# EAGLE board multicharger (EAGLE 9.4.0)
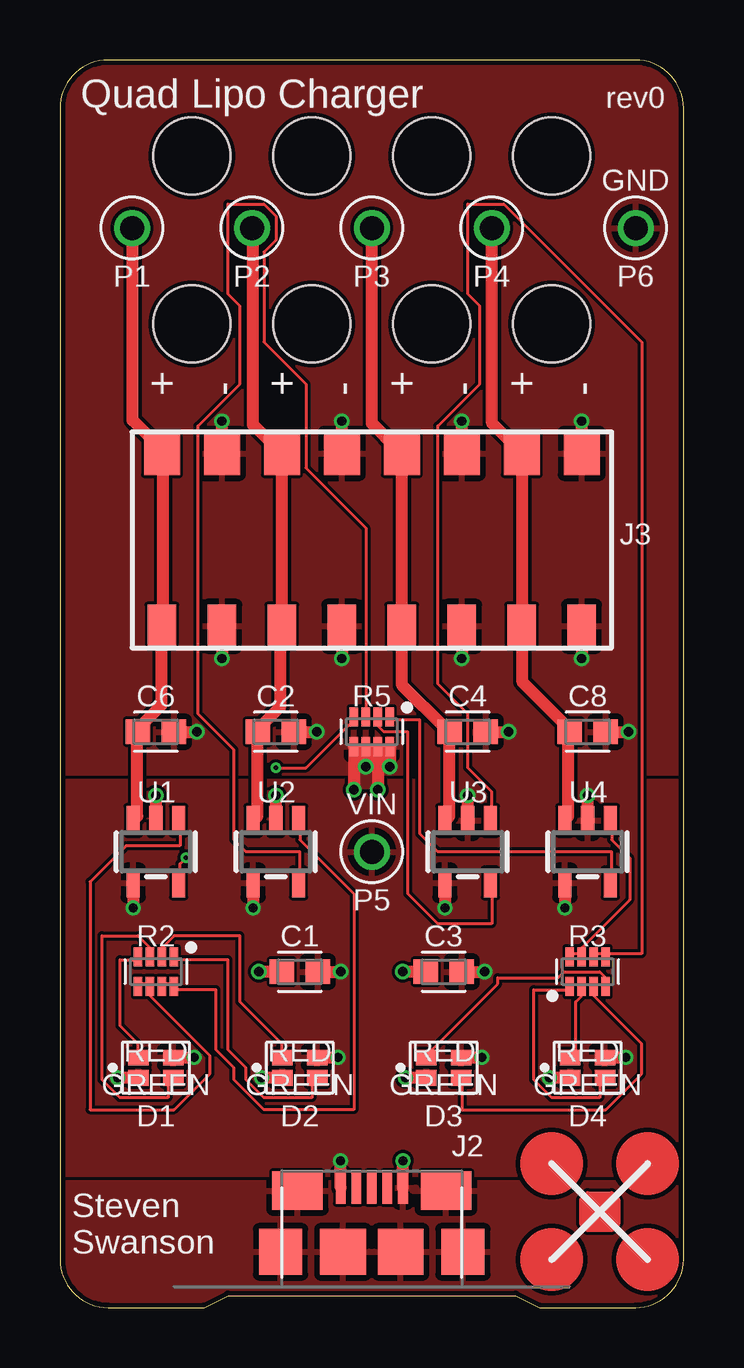
[diagram p0: board, top side]
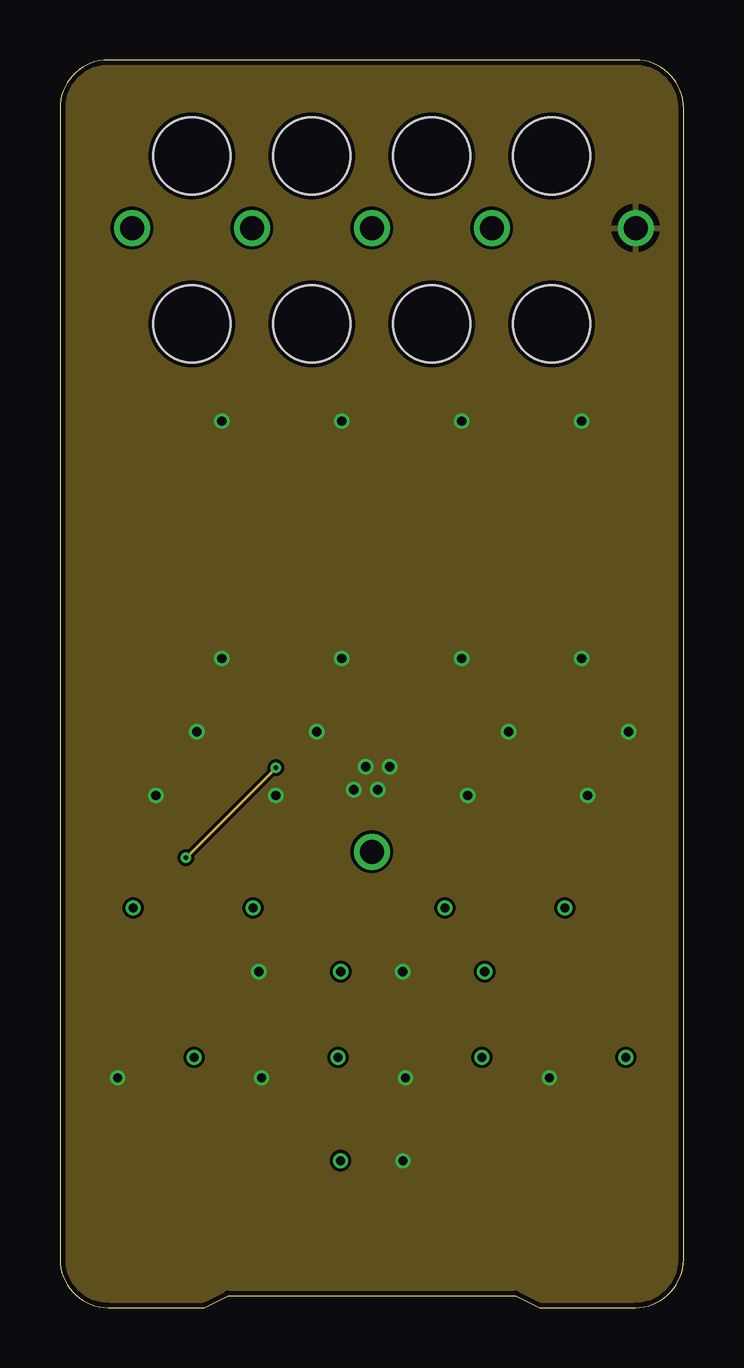
[diagram p1: board, inner layer Route2]
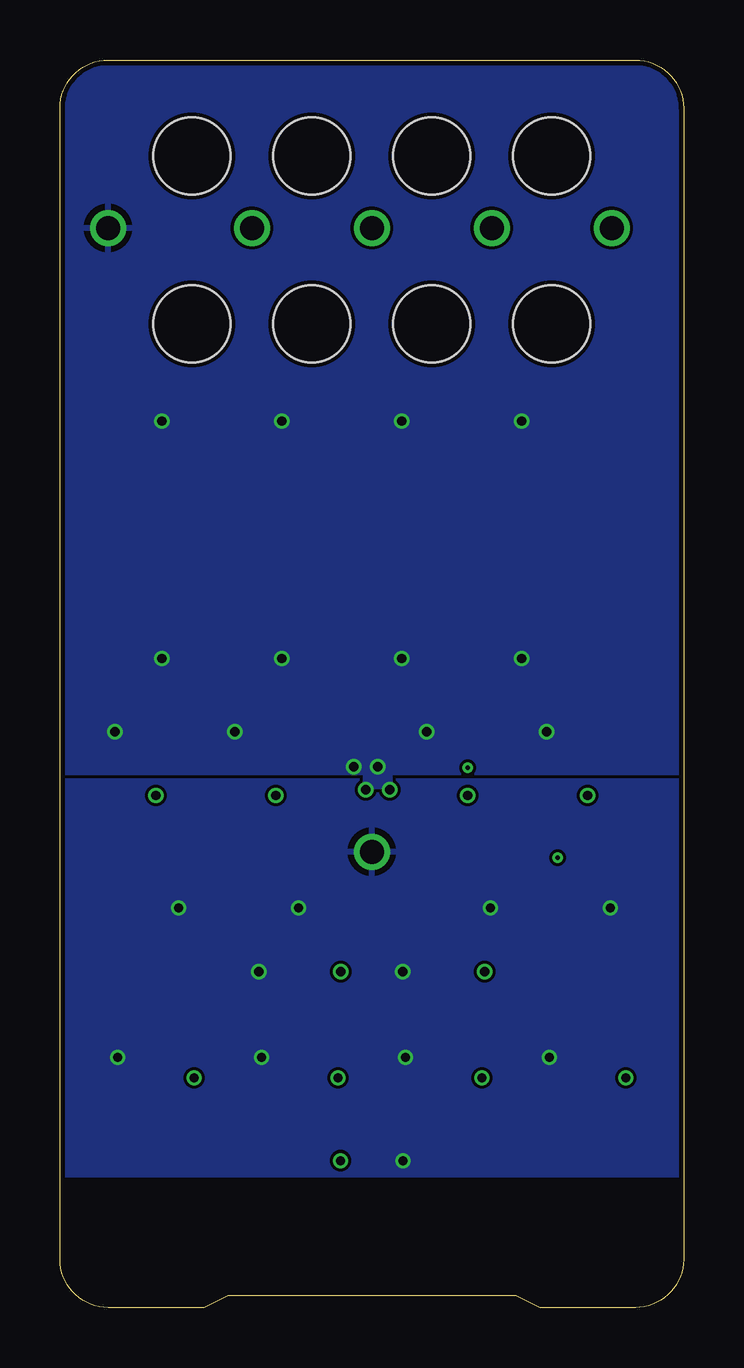
[diagram p2: board, bottom side, seen from below]

Size 26 x 52 mm. Coordinates in mm from the lower left corner, seen from the top.
Outline: 0,50 0,2 arc90 2,0 6,0 7,0.5 19,0.5 20,0 24,0 arc90 26,2 26,50 arc90 24,52 2,52 arc90 0,50
Copper layers (1*2*15*16): Top 0.035559375mm / dielectric 1.501140625mm / Route2 0.035559375mm / dielectric 0.149859375mm / Route15 0.035559375mm / dielectric 0.200659375mm / Bottom 0.035559375mm
Design rules "jlcpcb-4layer-5mil-small-cream": minimum track width 5mil, minimum drill 0.2mm, track to track 5mil, track to pad 5mil, pad to pad 5mil, via to via 5mil, smd to smd 5mil, copper to edge 0.2mm, drill to drill 10mil, minimum pad ring 3mil, minimum via ring 5mil, stop-mask expansion 0.05mm, vias tented up to drill 0.45mm, thermal gap 10mil
Net classes: 1 HIGH-I: drill 0.254 mm; 3 PWR: drill 0.381 mm; 4 LONG_PWR: width 0.508 mm, drill 0.381 mm
Holes 3.2 mm at 10.5,41 5.5,41 15.5,41 20.5,41 5.5,48 10.5,48 15.5,48 20.5,48

## Footprints (pad centres in the part's own frame; a part is rotated, then mirrored left to right if it is on the bottom)
CAPC1608X100 = smd 1.009 x 1.015: 1 -0.753,0; 2 0.753,0
LED-2X-LITE-ON-1.6MMX1.5MM = smd 0.85 x 0.65: A1 -0.725,0.425; A2 -0.725,-0.425; C1 0.725,0.425; C2 0.725,-0.425
USB-MICROA-10118192-0001LF = smd 0.4 x 1.35: 1 -1.3,0; 2 -0.65,0; 3 0,0; 4 0.65,0; 5 1.3,0 | smd 2.1 x 1.6: 6 3.1,-0.125; 7 -3.1,-0.125 | smd 1.8 x 1.9: 8 -3.8,-2.675; 11 3.8,-2.675 | smd 1.9 x 1.9: 9 1.2,-2.675; 10 -1.2,-2.675
WIRE-TERMINAL-1X8-2.5MM-SMD = smd 1.8 x 1.5: 1A 3.6,-8.75; 2A 3.6,-6.25; 3A 3.6,-3.75; 4A 3.6,-1.25; 5A 3.6,1.25; 6A 3.6,3.75; 7A 3.6,6.25; 8A 3.6,8.75 | smd 1.8 x 1.2: 1B -3.6,-8.75; 2B -3.6,-6.25; 3B -3.6,-3.75; 4B -3.6,-1.25; 5B -3.6,1.25; 6B -3.6,3.75; 7B -3.6,6.25; 8B -3.6,8.75
TEST-POINT-KEYSTONE-5000 = drill 1: T 0,0
RESCAXS50P200X100X45-8 = smd 0.79 x 0.339: 1 -0.62,0.75; 2 -0.62,0.25; 3 -0.62,-0.25; 4 -0.62,-0.75; 5 0.62,-0.75; 6 0.62,-0.25; 7 0.62,0.25; 8 0.62,0.75
SOT23-5 = smd 0.55 x 1.2: 1 -0.95,-1.3; 2 0,-1.3; 3 0.95,-1.3; 4 0.95,1.3; 5 -0.95,1.3

## Placement (x,y rotation side)
C1  10uF  [CAPC1608X100]  10,14 180 top
C2  10uF  [CAPC1608X100]  9,24 0 top
C3  10uF  [CAPC1608X100]  16,14 180 top
C4  10uF  [CAPC1608X100]  17,24 0 top
C6  10uF  [CAPC1608X100]  4,24 0 top
C8  10uF  [CAPC1608X100]  22,24 0 top
D1  LED-2X-GREEN/RED-1.6X1.5MM  [LED-2X-LITE-ON-1.6MMX1.5MM]  4,10 180 top
D2  LED-2X-GREEN/RED-1.6X1.5MM  [LED-2X-LITE-ON-1.6MMX1.5MM]  10,10 180 top
D3  LED-2X-GREEN/RED-1.6X1.5MM  [LED-2X-LITE-ON-1.6MMX1.5MM]  16,10 180 top
D4  LED-2X-GREEN/RED-1.6X1.5MM  [LED-2X-LITE-ON-1.6MMX1.5MM]  22,10 180 top
J2  USB-MICROA-AMPHENOL-10118192-0001LF  [USB-MICROA-10118192-0001LF]  13,5 0 top
J3  HEADER-8POS-  [WIRE-TERMINAL-1X8-2.5MM-SMD]  13,32 90 top
P1  TEST-POINT  [TEST-POINT-KEYSTONE-5000]  3,45 0 top
P2  TEST-POINT  [TEST-POINT-KEYSTONE-5000]  8,45 0 top
P3  TEST-POINT  [TEST-POINT-KEYSTONE-5000]  13,45 0 top
P4  TEST-POINT  [TEST-POINT-KEYSTONE-5000]  18,45 0 top
P5  TEST-POINT  [TEST-POINT-KEYSTONE-5000]  13,19 0 top
P6  TEST-POINT  [TEST-POINT-KEYSTONE-5000]  24,45 0 top
R2  510  [RESCAXS50P200X100X45-8]  4,14 270 top
R3  510  [RESCAXS50P200X100X45-8]  22,14 90 top
R5  2K  [RESCAXS50P200X100X45-8]  13,24 270 top
U1  MCP73831T-2ACI/OT  [SOT23-5]  4,19 180 top
U2  MCP73831T-2ACI/OT  [SOT23-5]  9,19 180 top
U3  MCP73831T-2ACI/OT  [SOT23-5]  17,19 180 top
U4  MCP73831T-2ACI/OT  [SOT23-5]  22,19 180 top
U$1  [QUADCLASS_LOGO_SMALL]  22.5,4 0 top

## Library data of the parts
C1-C4 C6 C8 = quadparts_prebuilt; CREATOR: Swanson; DIST: Digikey; DISTPN: 1276-1119-1-ND; MOUNTING: SMD
D1-D4 = RemoteParts; COLOR1: GREEN; COLOR2: RED; CREATOR: Swanson; DIST: DIGIKEY; DISTPN: 160-2252-1-ND; MOUNTING: SMD
J2 = RemoteParts; CREATOR: Swanson; DIST: DIGIKEY; DISTPN: 609-4613-1-ND; MOUNTING: SMD
J3 = quadparts_prebuilt; CREATOR: Swanson; DIST: DIGIKEY; DISTPN: 478-6173-1-ND; MOUNTING: SMD; PIN1: -; PIN2: +; PIN3: -; PIN4: +; PIN5: -; PIN6: +; PIN7: -; PIN8: +
P1-P6 = RemoteParts; CREATOR: Swanson; DIST: DIGIKEY; DISTPN: 36-5001-ND; MOUNTING: TH
R2 R3 = quadparts_prebuilt; CREATOR: Swanson; DIST: DIGIKEY; DISTPN: Y10511CT-ND; MOUNTING: SMD
R5 = quadparts_prebuilt; CREATOR: Swanson; DIST: DIGIKEY; DISTPN: Y10202CT-ND; MOUNTING: SMD
U1-U4 = RemoteParts; CREATOR: Adafruit; DIST: DIGIKEY; DISTPN: MCP73831T-2ACI/OTCT-ND; MOUNTING: SMD
U$1 = quadparts_prebuilt

## Nets
BPOS1 [LONG_PWR]: C6.1 J3.8A J3.8B P1.T U1.3
BPOS2 [LONG_PWR]: C2.1 J3.6A J3.6B P2.T U2.3
BPOS3 [LONG_PWR]: C4.1 J3.4A J3.4B P3.T U3.3
BPOS4 [LONG_PWR]: C8.1 J3.2A J3.2B P4.T U4.3
GND [LONG_PWR]: C1.2 C2.2 C3.2 C4.2 C6.2 C8.2 D1.C1 D2.C1 D3.C1 D4.C1 J2.5 J2.6 J2.7 J2.8 J2.9 J2.10 J2.11 J3.1A J3.1B J3.3A J3.3B J3.5A J3.5B J3.7A J3.7B P6.T R5.5 R5.6 R5.7 R5.8 U1.2 U2.2 U3.2 U4.2
N$1: D1.A1 R2.3
N$2: D1.C2 R2.4
N$3: R2.7 R2.8 U2.1
N$4: R5.3 U2.5
N$5: D2.A1 R2.1
N$6: D2.C2 R2.2
N$7: R3.5 R3.6 U3.1
N$8: R5.2 U3.5
N$9: D3.A1 R3.3
N$10: D3.C2 R3.4
N$11: R2.5 R2.6 U1.1
N$12: R5.4 U1.5
N$13: R3.7 R3.8 U4.1
N$14: R5.1 U4.5
N$15: D4.A1 R3.1
N$16: D4.C2 R3.2
VIN [LONG_PWR]: C1.1 C3.1 D1.A2 D2.A2 D3.A2 D4.A2 J2.1 P5.T U1.4 U2.4 U3.4 U4.4

## Tracks (layer width: path | path; a pad name or v marks a point on that pad's centre or on a via)
BPOS1
  Top 0.508: U1.3 3.09,20.35 3.22,20.48 3.22,23.97 C6.1 3.35,24.22 4.24,25.11 4.24,28.35 J3.8B 4.3,28.6 4.3,35.59 J3.8A 4.17,35.84 3.03,36.99 3.03,44.99 P1.T
BPOS2
  Top 0.508: U2.3 8.11,20.35 8.24,20.48 8.24,23.97 C2.1 8.36,24.22 9.19,25.05 9.19,28.35 J3.6B 9.25,28.6 J3.6A 9.06,35.78 8.05,36.8 8.05,44.99 P2.T
BPOS3
  Top 0.508: U3.3 16.11,20.35 16.24,20.48 16.24,23.97 C4.1 16.05,24.16 14.27,25.94 14.27,28.35 J3.4B 14.27,28.67 14.27,35.59 J3.4A 14.08,35.78 13,36.86 P3.T
BPOS4
  Top 0.508: U4.3 21.06,20.35 21.19,20.48 21.19,23.97 C8.1 21.13,24.22 19.29,26.06 19.29,28.35 J3.2B 19.29,28.6 19.29,35.59 J3.2A 19.1,35.78 18.02,36.86 18.02,44.99 P4.T
GND  (via drill 0.38)
  Top 0.508: C3.2 v14.29,14 | D4.C1 v20.41,9.57 | U3.2 v17,21.34 | U4.2 v22,21.34 | C1.2 v8.29,14 | U1.2 v4,21.34 | U2.2 v9,21.34 | D3.C1 v14.4,9.57 | J2.5 v14.3,6.12 | C4.2 v18.7,24 | D1.C1 v2.4,9.57 | D2.C1 v8.41,9.57 | C6.2 v5.71,24 | R5.8 v13.75,22.54 | R5.7 v13.25,21.59 | R5.6 v12.75,22.54 | R5.5 v12.25,21.59 | C8.2 v23.7,24 | J3.7B v6.75,27.06 | J3.5B v11.75,27.06 | J3.3B v16.75,27.06 | J3.1B v21.75,27.06 | J3.7A v6.75,36.94 | J3.5A v11.75,36.94 | J3.3A v16.75,36.94 | J3.1A v21.75,36.94 | C2.2 v10.71,24
  pour Bottom (rank 2): -0.5,53 -0.5,-1 27,-1 27,53
  pour Top (rank 3): -1,53.5 -1,-1.5 27.5,-1.5 27.5,53.5
  pour Route2: -1.5,54 -1.5,-2 28,-2 28,54
N$1
  Top 0.127: R2.3 3.75,15 3.25,15.5 1.75,15.5 1.75,9.5 2.5,8.75 4.5,8.75 4.5,9.5 D1.A1
N$2
  Top 0.127: R2.4 3.25,14.5 2.5,14.5 2.5,11.75 3.25,11 3.25,10.5 D1.C2
N$3
  Top 0.127: R2.7 4.25,13.5 4.75,13.5 R2.8 4.75,13.25 6.5,13.25 6.5,10.75 7.25,10 7.25,9.5 8.5,8.25 12.25,8.25 12.25,17.25 10,19.5 10,20.25 U2.1
N$4
  Top 0.127: R5.3 12.75,32.5 10.25,35 10.25,38.5 8.5,40.25 8.5,44 9,44.5 9,45.5 8.5,46 7,46 7,42.25 7.5,41.75 7.5,38.5 5.75,36.75 5.75,24.75 7.25,23.25 7.25,19.5 7.75,19 10,19 10,17.75 U2.5
N$5
  Top 0.127: R2.1 4.75,14.5 7,14.5 7,10.75 7.75,10 7.75,9.5 8.5,8.75 10.5,8.75 10.5,9.5 D2.A1
N$6
  Top 0.127: R2.2 4.25,15 4.75,15.5 7.5,15.5 7.5,12.75 9.25,11 9.25,10.5 D2.C2
N$7
  Top 0.127: 22.75,14.75 22.25,14.75 R3.6 | 22.75,14.75 24.25,14.75 24.25,40.25 18.5,46 17,46 17,42.25 17.5,41.75 17.5,38.5 15.75,36.75 15.75,26 17,24.75 17,22.5 18,21.5 18,20.5 U3.1 | 22.75,14.75 R3.5
N$8
  Top 0.127: R5.2 13.25,24.25 13.5,24 14.5,24 14.5,17.25 15.75,16 18,16 18,17.5 U3.5
N$9
  Top 0.127: R3.3 22.25,13 24.25,11 24.25,9.75 22.75,8.25 16.75,8.25 16.75,9.5 D3.A1
N$10
  Top 0.127: R3.4 22.75,13.75 22.5,14 21,14 20.75,13.75 18.25,13.75 18.25,13.5 15.5,10.75 15.5,10.5 D3.C2
N$11
  Top 0.127: R2.5 3.25,13.5 3.75,13.5 R2.6 3.75,13 6.25,10.5 6.25,9.75 4.75,8.25 1.25,8.25 1.25,17.75 2.75,19.25 5,19.25 5,20.25 U1.1
N$12  (via drill 0.2)
  Top 0.127: v9,22.5 10.25,22.5 12.25,24.5 R5.4 | v5.25,18.75 5,18.5 5,17.75 U1.5
  Route2 0.127: v5.25,18.75 v9,22.5
N$13
  Top 0.127: 21.75,14.75 21.25,14.75 R3.8 | 21.75,14.75 21.75,15 23.75,17 23.75,18.75 23,19.5 23,20.25 U4.1 | 21.75,14.75 R3.7
N$14
  Top 0.127: R5.1 13.75,24.5 15,24.5 15,19.75 15.75,19 23,19 23,17.75 U4.5
N$15
  Top 0.127: R3.1 21.25,13.25 19.75,13.25 19.75,9.5 20.5,8.75 22.5,8.75 22.5,9.5 D4.A1
N$16
  Top 0.127: R3.2 21.75,13 21.5,12.75 21.5,10.5 D4.C2
VIN  (via drill 0.38)
  Top 0.508: D2.A2 v11.6,10.43 | J2.1 v11.7,6.12 | D1.A2 v5.59,10.43 | D3.A2 v17.59,10.43 | U2.4 v8.05,16.66 | U1.4 v3.05,16.66 | C1.1 v11.71,14 | U4.4 v21.05,16.66 | U3.4 v16.05,16.66 | D4.A2 v23.59,10.43 | C3.1 v17.7,14
  pour Bottom: -2.5,22 29,22 29,5.5 -2.5,5.5
  pour Top (rank 2): -3,22 29.5,22 29.5,5.5 -3,5.5

## Text on the board
tPlace: Quad Lipo Charger | rev0 | GND | VIN | Steven / Swanson